# Altium PCB MCP2515.PcbDoc
Units mil, origin at the board's own origin, x right, y up, seen from the top; angles counter-clockwise.
Board outline not stored, 2 copper layers (Top Layer, Bottom Layer); 9 components, 0 nets, 38 pads, 6 vias.
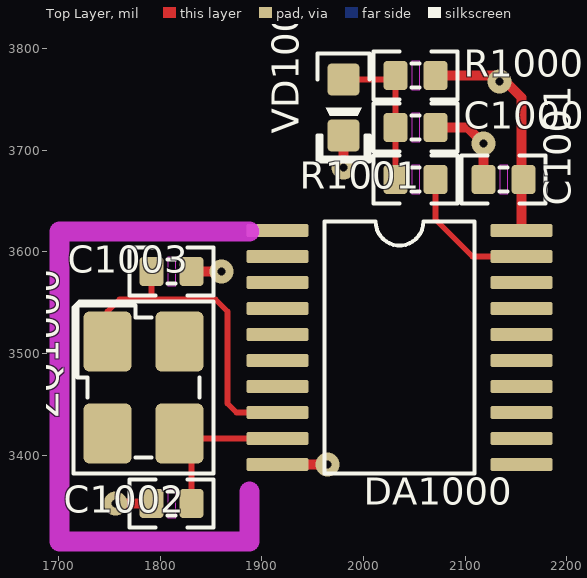
[diagram p0: Top Layer view]
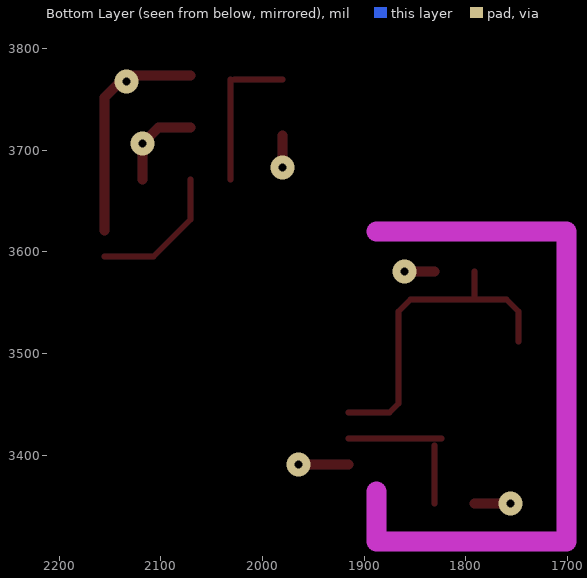
[diagram p1: Bottom Layer view, seen from below]

## Layer stack, top to bottom
Top Solder: solder mask 0.4, Solder Resist, Dk 3.5
Top Layer: signal copper 1.4
Dielectric 1: dielectric 12.6, FR-4, Dk 4.8
Bottom Layer: signal copper 1.4
Bottom Solder: solder mask 0.4, Solder Resist, Dk 3.5

## Components (designator, comment, footprint, x,y, rotation, side; value= is the part's Value field where it differs from the comment)
C1000 "0,1" CAP0402 2051.18,3722.44 r180 top
C1001 "0,1" CAP0402 2137.8,3671.26 r180 top
C1002 "15" CAP0402 1811.02,3352.36 r0 top
C1003 "15" CAP0402 1811.02,3580.71 r0 top
DA1000 "MCP2515" SSOP20-4.4 2035.43,3505.91 r0 top
R1000 "10K" RES0402 2051.18,3773.62 r0 top
R1001 "10K" RES0402 2051.18,3671.26 r180 top
VD1000 "RB521S30T1G" SOD-523F 1980.32,3761.81 r180 top
ZQ1000 "20MHz" KX-7 1783.46,3466.54 r270 top

## Footprints (in the part's own frame and the unit in brackets; to place one, negate y for a bottom-side part, rotate by r counter-clockwise, add the part's x,y. Pads: shape width x height; smd on the part's side, far side on the other; paste and mask are expansions set on the pad)
CAP0402 [mm]
  rrect25% 0.59x0.72 smd: 1(-0.5,0) 2(0.5,0)
  Top Layer keep-out region: -0.1,0.36 -0.1,-0.36 0.1,-0.36 0.1,0.36
  silkscreen extent -1.05,-0.6 1.05,0.6, body extent -0.5,-0.25 0.5,0.25, height 0.49
KX-7 [mm]
  rrect25% 1.5x1.2 smd: 1(-1.15,-0.9) 2(1.15,-0.9) 3(1.15,0.9) 4(-1.15,0.9)
  silkscreen extent -2.15,-1.75 2.15,1.75, body extent -1.6,-1.25 1.6,1.25, height 1.21
RES0402 [mm]
  rrect25% 0.59x0.72 smd: 1(-0.5,0) 2(0.5,0)
  Top Layer keep-out region: -0.1,0.36 -0.1,-0.36 0.1,-0.36 0.1,0.36
  silkscreen extent -1.05,-0.6 1.05,0.6, body extent -0.5,-0.25 0.5,0.25, height 0.33
SOD-523F [mm]
  rrect25% 0.8x0.8 smd: 1(0,-0.2) 2(0,1.2)
  silkscreen extent -0.65,-0.85 0.65,1.85, body extent -0.4,-0.3 0.4,1.3, height 0.7
SSOP20-4.4 [mm]
  rrect25% 1.55x0.32 smd: 1(-3.05,2.925) 2(-3.05,2.275) 3(-3.05,1.625) 4(-3.05,0.975) 5(-3.05,0.325) 6(-3.05,-0.325) 7(-3.05,-0.975) 8(-3.05,-1.625) 9(-3.05,-2.275) 10(-3.05,-2.925) 11(3.05,-2.925) 12(3.05,-2.275) 13(3.05,-1.625) 14(3.05,-0.975) 15(3.05,-0.325) 16(3.05,0.325) 17(3.05,0.975) 18(3.05,1.625) 19(3.05,2.275) 20(3.05,2.925)
  silkscreen extent -1.87,-3.15 1.87,3.15, body extent -3.2,-3.25 3.2,3.25, height 1.2

## Part data
C1000 C1001 C1002 C1003: library part CAP_0402, "Конденсатор чип", Тип компонента="Конденсатор чип", Тип корпуса=0402, Тип монтажа=Поверхностный
  C1000 C1001: Номинал=0,1
  C1002 C1003: Напряжение=50V, Номинал=15
DA1000: "Интерфейс CAN SPI", Наименование=MCP2515, Производитель=Microchip, Тип компонента="Интерфейс CAN SPI", Тип корпуса=SSOP20, Тип монтажа=Поверхностный, Характеристики=1Мб/с
R1000 R1001: library part RES_0402, "Резистор чип", Номинал=10K, Тип компонента="Резистор чип", Тип корпуса=0402, Тип монтажа=Поверхностный, Характеристики="0.062Вт 50В"
VD1000: "Диод Шоттки", Наименование=RB521S30T1G, Производитель="ON Semiconductor", Тип компонента="Диод Шоттки", Тип корпуса=SOD523, Тип монтажа=Поверхностный, Характеристики="30В 200мА 500мВ"
ZQ1000: library part KX-7, "Кварц", Номинал=20MHz, Производитель=Geyer, Тип компонента=Кварц, Тип корпуса=KX-7, Тип монтажа=Поверхностный

## Via types
v1: diameter 23.62, hole 7.87, Top Layer to Bottom Layer, tented both sides, 6 vias

## Nets (pads, with @x,y where several pads share a name; then routed paths per layer and width w, separated by ;. In a path a pad name is that pad's centre, name@x,y a point inside that pad or via, vN(x,y) a via of type N, cw(c..) or ccw(c..) an arc to the next point about the centre after c; other vN are vias at no path point)
pads on no net: C1000.1 C1000.2 C1001.1 C1001.2 C1002.1 C1002.2 C1003.1 C1003.2 DA1000.1 DA1000.2 DA1000.3 DA1000.4 DA1000.5 DA1000.6 DA1000.7 DA1000.8 DA1000.9 DA1000.10 DA1000.11 DA1000.12 DA1000.13 DA1000.14 DA1000.15 DA1000.16 DA1000.17 DA1000.18 DA1000.19 DA1000.20 R1000.1 R1000.2 R1001.1 R1001.2 VD1000.1 VD1000.2 ZQ1000.1 ZQ1000.2 ZQ1000.3 ZQ1000.4
copper on no net: | length 1221.2
  Top Layer w5.91: 1748.03,3511.81 1748.03,3541.34 1759.84,3553.15 1854.33,3553.15 1866.14,3541.34 1866.14,3450.79 1875,3441.93 1915.36,3441.93 ; 1791.34,3553.15 1791.34,3580.71 ; 1823.82,3416.34 1915.36,3416.34 ; 1830.71,3352.36 1830.71,3409.45 ; 1980.32,3769.68 2027.56,3769.68 ; 2031.5,3671.26 2031.5,3769.68 ; 2070.87,3671.26 2070.87,3631.89 2107.28,3595.47 2155.51,3595.47
  Top Layer w9.84: v1(1755.91,3352.36) 1791.34,3352.36 ; 1830.71,3580.71 v1(1860.24,3580.71) ; 1915.36,3390.75 v1(1964.57,3390.75) ; v1(1980.32,3683.07) 1980.32,3714.57 ; 2070.87,3722.44 2102.36,3722.44 v1(2118.11,3706.69) 2118.11,3671.26 ; 2070.87,3773.62 2133.86,3773.62 2155.51,3751.97 2155.51,3621.06
  other v1: 2133.86,3767.72

## Keep-outs
Multi-Layer:
  lines w19.68: 1887.8,3364.17 1887.8,3314.96 1700.79,3314.96 1700.79,3620.08 1887.8,3620.08